# Allegro board test-um_01v1.brd
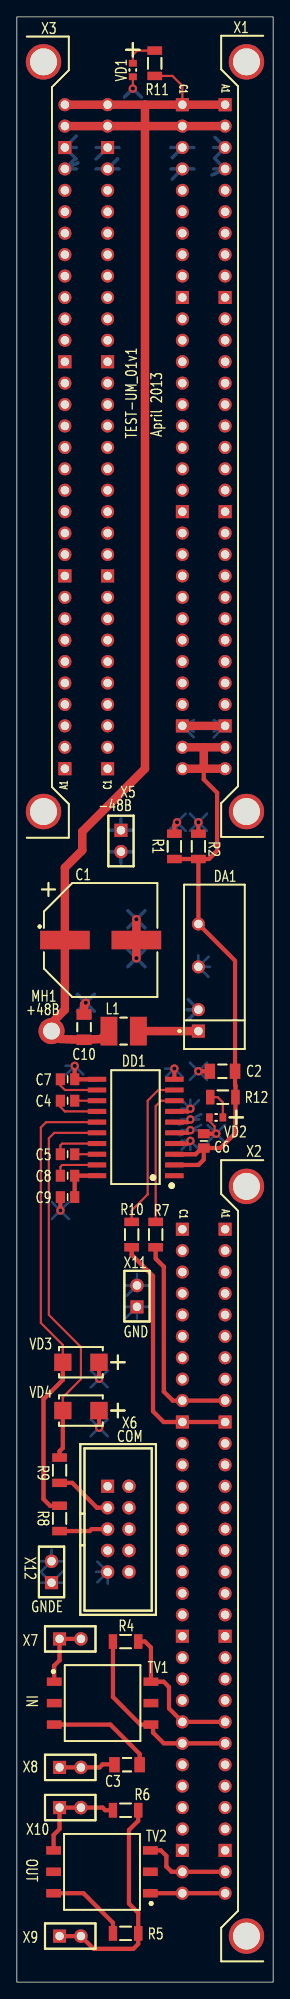
[diagram p0: board, top side]
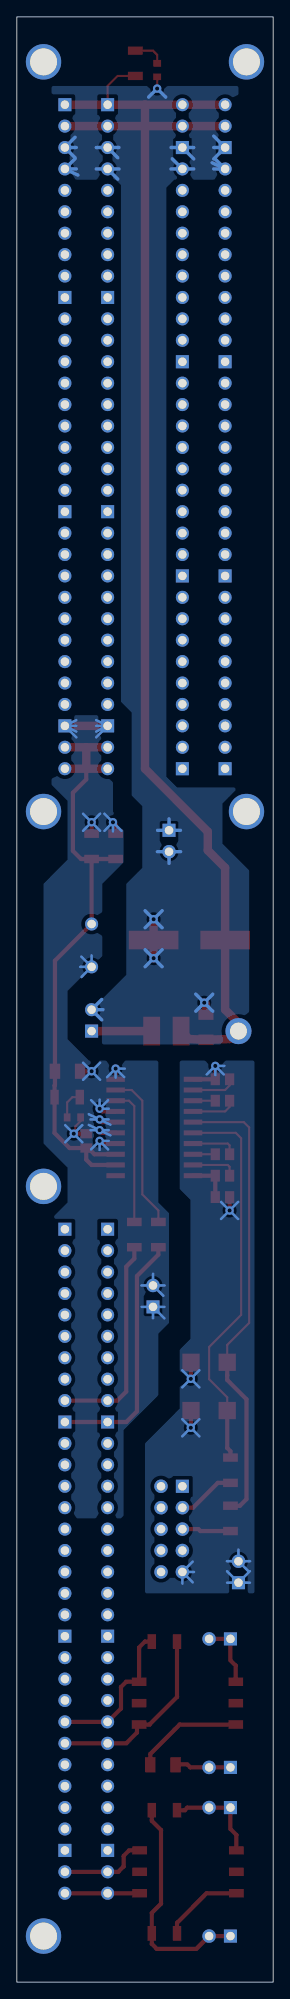
[diagram p1: board, bottom side, seen from below]

Outline 30.48 x 233.04 mm; copper layers: TOP, BOTTOM. Coordinates in mm from the lower left corner of the outline.
Outline path: rectangle 0,0 30.48,233.04

## Placement (name value [footprint] x y rotation side)
C1  47,0u  [CAPAE1350X1550N]  9.96 123.57 0 top
C2  10,0u  [CAPC3216X180N]  24.45 108.01 180 top
C3  1,0u  [CAPC3216X95N]  13.11 25.78 180 top
C4  0,1u  [CAPC2013X95N]  6.03 104.52 0 top
C5  0,1u  [CAPC2013X95N]  6.03 98.17 180 top
C6  0,1u  [CAPC2013X95N]  22.23 99.76 90 top
C7  0,1u  [CAPC2013X95N]  6.03 107.06 0 top
C8  0,1u  [CAPC2013X95N]  6.03 95.63 0 top
C9  0,1u  [CAPC2013X95N]  6.03 93.09 180 top
C10  0,1u  [CAPC3216X145N]  8 113.24 90 top
DA1  P6CU-4805ELF  [SIP720W50P254L1950H1050Q7P_S1KV]  23.49 120.4 180 top
DD1  ADM3251  [SOIC127P1032X265-20]  18.73 95.63 90 top
L1  10u  [INDC4532X280N]  12.7 112.78 0 top
MH1  +48B  [MTG_180_310]  4.13 112.78 0 top
R1  510  [RESC3116X65N]  18.73 134.68 270 top
R2  510  [RESC3116X65N]  21.59 134.68 270 top
R4  200  [RESC3116X65N]  12.93 40.39 0 top
R5  75  [RESC3116X65N]  12.93 5.78 0 top
R6  75  [RESC3116X65N]  12.93 20.38 0 top
R7  510  [RESC3116X65N]  16.51 88.65 270 top
R8  100  [RESC3116X65N]  5.08 54.99 90 top
R9  100  [RESC3116X65N]  5.08 60.71 90 top
R10  100  [RESC3116X65N]  13.65 88.65 270 top
R11  20k  [RESC3116X65N]  16.39 227.54 270 top
R12  2k  [RESC3116X65N]  24.49 104.94 180 top
TV1  78253  [XFMR_78253MVC]  10.2 33.08 0 top
TV2  78253  [XFMR_78253MVC]  10.12 13.08 180 top
VD1  green  [LEDC1608X110N]  13.79 226.74 90 top
VD2  green  [LEDC1608X110N]  23.7 102.54 0 top
VD3  18B  [DIOM5236X261N]  7.62 73.5 0 top
VD4  18B  [DIOM5236X261N]  7.62 67.78 0 top
X1  DIN-32x2FR  [DIN_41612_64_FR]  27.94 183.26 180 top
X2  DIN-32x2FR  [DIN_41612_64_FR]  27.94 49.91 180 top
X3  DIN-32x2  [DIN_41612_64_MR]  2.54 183.26 0 top
X5  -48B  [HDRV1X2P254]  12.38 135.32 270 top
X6  IDC-10M  [IDC_10M]  12.06 53.72 0 top
X7  UM_IN-  [HDRV1X2P254]  6.35 40.7 0 top
X8  UM_IN+  [HDRV1X2P254]  6.35 25.46 0 top
X9  UM_OUT+  [HDRV1X2P254]  6.35 5.46 0 top
X10  UM_OUT-  [HDRV1X2P254]  6.35 20.7 0 top
X11  PLS-2  [HDRV1X2P254]  14.29 81.34 90 top
X12  PLS-2  [HDRV1X2P254]  4.13 48.64 90 top

## Library data of the parts
C1 = CAP_P
C2-C10 = CAP_NP
DA1 = SIP7_SINGLE_4_6
DD1 = ADM3251_RW20
L1 = INDUCTOR
MH1 = MOUNTING_HOLE_PLATED
R1 R2 R4-R12 = RES_0.25W
TV1 TV2 = 78253
VD1 VD2 = DIODE_LED
VD3 VD4 = DIODE_TVS_BI
X1 X2 = CON_32X2
X3 = CON_32x2
X5 X7-X12 = CON_2
X6 = CON_10

## Footprints (pads in the part's own frame, mm; a bottom-side part is the same pattern mirrored in y, then rotated)
CAPAE1350X1550N
  rect 5.9x2.2 smd: 1(-4.25,0) 2(4.25,0)
CAPC2013X95N
  rect 1.1x1.4 smd: 1(-0.85,0) 2(0.85,0)
CAPC3216X95N
  rect 1.25x1.8 smd: 1(-1.5,0) 2(1.5,0)
CAPC3216X145N
  rect 1.25x1.8 smd: 1(-1.5,0) 2(1.5,0)
CAPC3216X180N
  rect 1.25x1.8 smd: 1(-1.5,0) 2(1.5,0)
DIN_41612_64_FR
  rect 1.55x1.55 hole 1: A1(3.175,-39.37) A10(3.175,-16.51) A20(3.175,8.89) A30(3.175,34.29) C1(8.255,-39.37) C10(8.255,-16.51) C20(8.255,8.89) C30(8.255,34.29)
  round 1.55 hole 1: A2(3.175,-36.83) A3(3.175,-34.29) A4(3.175,-31.75) A5(3.175,-29.21) A6(3.175,-26.67) A7(3.175,-24.13) A8(3.175,-21.59) A9(3.175,-19.05) A11(3.175,-13.97) A12(3.175,-11.43) A13(3.175,-8.89) A14(3.175,-6.35) A15(3.175,-3.81) A16(3.175,-1.27) A17(3.175,1.27) A18(3.175,3.81) A19(3.175,6.35) A21(3.175,11.43) A22(3.175,13.97) A23(3.175,16.51) A24(3.175,19.05) A25(3.175,21.59) A26(3.175,24.13) A27(3.175,26.67) A28(3.175,29.21) A29(3.175,31.75) A31(3.175,36.83) A32(3.175,39.37) C2(8.255,-36.83) C3(8.255,-34.29) C4(8.255,-31.75) C5(8.255,-29.21) C6(8.255,-26.67) C7(8.255,-24.13) C8(8.255,-21.59) C9(8.255,-19.05) C11(8.255,-13.97) C12(8.255,-11.43) C13(8.255,-8.89) C14(8.255,-6.35) C15(8.255,-3.81) C16(8.255,-1.27) C17(8.255,1.27) C18(8.255,3.81) C19(8.255,6.35) C21(8.255,11.43) C22(8.255,13.97) C23(8.255,16.51) C24(8.255,19.05) C25(8.255,21.59) C26(8.255,24.13) C27(8.255,26.67) C28(8.255,29.21) C29(8.255,31.75) C31(8.255,36.83) C32(8.255,39.37)
  round 4.2 hole 3.2: HOLE1(0.635,-44.45) HOLE2(0.635,44.45)
DIN_41612_64_MR
  rect 1.55x1.55 hole 1: A1(3.175,-39.37) A10(3.175,-16.51) A20(3.175,8.89) A30(3.175,34.29) C1(8.255,-39.37) C10(8.255,-16.51) C20(8.255,8.89) C30(8.255,34.29)
  round 1.55 hole 1: A2(3.175,-36.83) A3(3.175,-34.29) A4(3.175,-31.75) A5(3.175,-29.21) A6(3.175,-26.67) A7(3.175,-24.13) A8(3.175,-21.59) A9(3.175,-19.05) A11(3.175,-13.97) A12(3.175,-11.43) A13(3.175,-8.89) A14(3.175,-6.35) A15(3.175,-3.81) A16(3.175,-1.27) A17(3.175,1.27) A18(3.175,3.81) A19(3.175,6.35) A21(3.175,11.43) A22(3.175,13.97) A23(3.175,16.51) A24(3.175,19.05) A25(3.175,21.59) A26(3.175,24.13) A27(3.175,26.67) A28(3.175,29.21) A29(3.175,31.75) A31(3.175,36.83) A32(3.175,39.37) C2(8.255,-36.83) C3(8.255,-34.29) C4(8.255,-31.75) C5(8.255,-29.21) C6(8.255,-26.67) C7(8.255,-24.13) C8(8.255,-21.59) C9(8.255,-19.05) C11(8.255,-13.97) C12(8.255,-11.43) C13(8.255,-8.89) C14(8.255,-6.35) C15(8.255,-3.81) C16(8.255,-1.27) C17(8.255,1.27) C18(8.255,3.81) C19(8.255,6.35) C21(8.255,11.43) C22(8.255,13.97) C23(8.255,16.51) C24(8.255,19.05) C25(8.255,21.59) C26(8.255,24.13) C27(8.255,26.67) C28(8.255,29.21) C29(8.255,31.75) C31(8.255,36.83) C32(8.255,39.37)
  round 4.2 hole 3.2: HOLE1(0.635,-44.45) HOLE2(0.635,44.45)
DIOM5236X261N
  rect 2.05x2.05 smd: A(2.15,0) C(-2.15,0)
HDRV1X2P254
  rect 1.55x1.55 hole 1: 1(-1.27,0)
  round 1.6 hole 1: 2(1.27,0)
IDC_10M
  rect 1.55x1.55 hole 1: 1(-1.27,5.08)
  round 1.6 hole 1: 2(1.27,5.08) 3(-1.27,2.54) 4(1.27,2.54) 5(-1.27,0) 6(1.27,0) 7(-1.27,-2.54) 8(1.27,-2.54) 9(-1.27,-5.08) 10(1.27,-5.08)
INDC4532X280N
  rect 2x3.4 smd: 1(-1.75,0) 2(1.75,0)
LEDC1608X110N
  rect 0.8x0.95 smd: A(0.8,0) C(-0.8,0)
MTG_180_310
  round 3.1 hole 2: 1(0,0)
RESC3116X65N
  rect 1x1.75 smd: 1(-1.5,0) 2(1.5,0)
SIP720W50P254L1950H1050Q7P_S1KV
  rect 1.55x1.55 hole 1: 1(1.905,7.62)
  round 1.55 hole 1: 2(1.905,5.08) 4(1.905,0) 6(1.905,-5.08)
SOIC127P1032X265-20
  rect 0.6x2.2 smd: 1(0,0) 2(1.27,0) 3(2.54,0) 4(3.81,0) 5(5.08,0) 6(6.35,0) 7(7.62,0) 8(8.89,0) 9(10.16,0) 10(11.43,0) 11(11.43,9.2) 12(10.16,9.2) 13(8.89,9.2) 14(7.62,9.2) 15(6.35,9.2) 16(5.08,9.2) 17(3.81,9.2) 18(2.54,9.2) 19(1.27,9.2) 20(0,9.2)
XFMR_78253MVC
  rect 1.75x1 smd: 1(-5.75,2.54) 2(-5.75,0) 3(-5.75,-2.54) 4(5.75,-2.54) 5(5.75,0) 6(5.75,2.54)

## Nets
GND: C2.2 C6.2 DA1.4(-VOUT) DD1.4(GND#0) DD1.5(GND#1) DD1.6(GND#2) DD1.7(GND#3) DD1.10(GND#4) R1.1 R2.1 VD2.C X1.A30 X1.C30 X11.1 X11.2
GNDE: C7.2 C9.2 DD1.11(GNDISO) VD3.A VD4.A X6.9 X12.1 X12.2
+5B: C2.1 C6.1 DA1.6(+VOUT) DD1.2(VCC#0) DD1.3(VCC#1) R1.2 R2.2 R12.1 X1.A31 X1.A32 X1.C31 X1.C32
+48B: C1.1 C10.1 L1.1 MH1.1 R11.2 X1.A1 X1.A2 X1.C1 X1.C2 X3.A31 X3.A32 X3.C31 X3.C32
+BSP_IN_HF: R5.2 R6.2 X9.1 X9.2
+BSP_OUT_HF: C3.2 X8.1 X8.2
-48B: C1.2 C10.2 DA1.2(-VIN) VD1.C X1.A3 X1.A4 X1.C3 X1.C4 X3.A29 X3.A30 X3.C29 X3.C30 X5.1 X5.2
-BSP_IN_HF: R6.1 TV2.4 X10.1 X10.2
-BSP_OUT_HF: TV1.1 X7.1 X7.2
IO1: R4.2 TV1.6 X2.A24 X2.C24
IO2: R4.1 TV1.4 X2.A25 X2.C25
IO3: TV2.3 X2.A31 X2.C31
IO4: TV2.1 X2.A32 X2.C32
RXD: R9.1 X6.3
RXUM: R10.2 X2.A10 X2.C10
TXD: R8.1 X6.5
TXUM: R7.2 X2.A9 X2.C9
N01903: R5.1 TV2.6
N03987: C3.1 TV1.3
N70867: DD1.15(RIN) R8.2 VD3.C
N70871: DD1.16(TOUT) R9.2 VD4.C
N70875: C4.1 DD1.14(C2+)
N70879: C4.2 DD1.13(C2-)
N70891: C5.1 DD1.18(C1+)
N70911: C5.2 DD1.17(C1-)
N70923: C7.1 DD1.12(V-)
N70931: C8.1 DD1.19(V+)
N70935: C8.2 C9.1 DD1.20(VISO)
N128847: DA1.1(+VIN) L1.2
N138210: DD1.8(ROUT) R7.1
N138266: DD1.9(TIN) R10.1
N141744: R11.1 VD1.A
N141896: R12.2 VD2.A

Pads without a net: DD1 1; TV1 2 5; TV2 2 5; X1 A5 A6 A7 A8 A9 A10 A11 A12 A13 A14 A15 A16 A17 A18 A19 A20 A21 A22 A23 A24 A25 A26 A27 A28 A29 C5 C6 C7 C8 C9 C10 C11 C12 C13 C14 C15 C16 C17 C18 C19 C20 C21 C22 C23 C24 C25 C26 C27 C28 C29 HOLE1 HOLE2; X2 A1 A2 A3 A4 A5 A6 A7 A8 A11 A12 A13 A14 A15 A16 A17 A18 A19 A20 A21 A22 A23 A26 A27 A28 A29 A30 C1 C2 C3 C4 C5 C6 C7 C8 C11 C12 C13 C14 C15 C16 C17 C18 C19 C20 C21 C22 C23 C26 C27 C28 C29 C30 HOLE1 HOLE2; X3 A1 A2 A3 A4 A5 A6 A7 A8 A9 A10 A11 A12 A13 A14 A15 A16 A17 A18 A19 A20 A21 A22 A23 A24 A25 A26 A27 A28 C1 C2 C3 C4 C5 C6 C7 C8 C9 C10 C11 C12 C13 C14 C15 C16 C17 C18 C19 C20 C21 C22 C23 C24 C25 C26 C27 C28 HOLE1 HOLE2; X6 1 2 4 6 7 8 10

## Via types
v1: diameter 1, hole 0.5, TOP to BOTTOM, 17 vias

## Routing (per net, layer and track width the routed paths; a pad name or vN(x,y) marks a point on that pad's centre or on a via; arc(x,y) is an arc through that point)
GND: length 100.7
  TOP w0.25: v1(23.71,100.61) 23.52,100.8 23.52,101.49 22.89,102.11 VD2.C
  TOP w0.5: v1(19.05,137.54) 18.73,137.22 R1.1 ; DD1.6 20.32,101.98 v1(20.64,102.3) ; DD1.5 20.32,100.71 v1(20.64,101.03) ; C6.2 v1(23.71,100.61) ; DD1.7 20.32,103.25 v1(20.64,103.57) ; DD1.10 v1(18.73,108.33) ; v1(20.64,99.76) 20.32,99.44 DD1.4 ; C2.2 v1(21.59,108.01) ; R2.1 v1(21.59,137.54)
  TOP w1: X1.A30 X1.C30
  BOTTOM w0.303: 23.41,148.97 X1.A30 ; X1.A30 23.41,148.29 ; X1.A30 23.41,147.62 ; X1.A30 23.41,149.65 ; 19.05,136.46 v1(19.05,137.54) ; v1(19.05,137.54) 20.06,138.55 ; v1(19.05,137.54) 18.04,136.53 ; v1(19.05,137.54) 20.06,136.53 ; v1(20.64,103.57) 21.65,104.58 ; v1(20.64,103.57) 20.64,104.65 ; v1(20.64,103.57) 19.62,104.58 ; v1(20.64,103.57) 19.56,103.57 ; 20.64,98.68 v1(20.64,99.76) ; v1(20.64,99.76) 21.65,98.75 ; v1(20.64,99.76) 19.62,98.75 ; v1(20.64,99.76) 19.56,99.76 ; v1(20.64,101.03) 21.93,101.65 ; v1(20.64,101.03) 19.56,101.03 ; v1(20.64,101.03) 21.72,101.03 ; v1(20.64,101.03) 19.35,100.41 ; 17.65,108.33 v1(18.73,108.33) ; v1(18.73,108.33) 19.75,107.32 ; v1(18.73,108.33) 17.72,107.32 ; v1(18.73,108.33) 18.73,107.25 ; 22.7,99.6 v1(23.71,100.61) ; v1(23.71,100.61) 22.7,101.62 ; v1(23.71,100.61) 24.72,101.62 ; v1(23.71,100.61) 24.72,99.6 ; 13.06,81.39 X11.2 ; X11.2 15.67,82.61 ; X11.2 12.91,82.61 ; X11.2 14.29,83.99 ; v1(21.59,108.01) 22.6,109.03 ; v1(21.59,108.01) 22.6,107 ; v1(21.59,108.01) 20.58,109.03 ; v1(21.59,108.01) 20.58,107 ; 19.35,101.67 v1(20.64,102.3) ; v1(20.64,102.3) 21.72,102.3 ; v1(20.64,102.3) 21.93,102.92 ; v1(20.64,102.3) 19.56,102.3 ; DA1.4 22.8,119.19 ; DA1.4 22.94,120.4 ; DA1.4 21.59,121.75 ; DA1.4 22.8,121.6 ; 20.58,138.55 v1(21.59,137.54) ; v1(21.59,137.54) 22.6,136.53 ; v1(21.59,137.54) 22.6,138.55 ; v1(21.59,137.54) 20.58,136.53 ; 14.29,78.72 X11.1 ; X11.1 12.93,80.07 ; X11.1 12.93,78.72 ; X11.1 15.64,80.07 ; X1.C30 21.04,148.29 ; X1.C30 21.04,147.62 ; X1.C30 21.04,149.65 ; X1.C30 21.04,148.97
GNDE: length 50.7
  TOP w0.5: v1(9.79,71.54) 9.77,73.5 VD3.A ; C9.2 v1(5.18,91.5) ; DD1.11 C7.2 v1(6.88,108.65) ; v1(9.79,65.74) 9.77,67.78 VD4.A
  BOTTOM w0.303: 8.78,66.75 v1(9.79,65.74) ; v1(9.79,65.74) 8.78,64.73 ; v1(9.79,65.74) 10.81,64.73 ; v1(9.79,65.74) 10.81,66.75 ; v1(5.18,91.5) 6.2,92.52 ; v1(5.18,91.5) 4.17,92.52 ; v1(5.18,91.5) 4.17,90.49 ; v1(5.18,91.5) 6.2,90.49 ; X12.2 4.13,51.29 ; X12.2 2.75,49.91 ; X12.2 5.51,49.91 ; X12.2 2.9,48.69 ; 8.78,72.55 v1(9.79,71.54) ; v1(9.79,71.54) 10.81,70.53 ; v1(9.79,71.54) 10.81,72.55 ; v1(9.79,71.54) 8.78,70.53 ; v1(6.88,108.65) 7.9,107.64 ; v1(6.88,108.65) 5.87,107.64 ; v1(6.88,108.65) 6.88,107.57 ; v1(6.88,108.65) 5.8,108.65 ; X12.1 5.48,48.72 ; X12.1 2.77,47.37 ; X12.1 2.77,48.72 ; X12.1 5.48,47.37 ; 9.57,49.87 X6.9 ; X6.9 9.42,48.64 ; X6.9 10.79,47.26 ; X6.9 9.57,47.42
+5B: length 76.3
  TOP w0.5: DD1.2 21.59,96.9 22.23,97.54 C6.1 ; DD1.3 21.26,98.17 22,98.91 C6.1 ; R2.2 22.84,133.18 23.81,134.15 23.81,141.03 22.23,142.62 22.23,143.89 ; R2.2 DA1.6 25.95,121.12 C2.1 25.95,106.36 25.99,106.32 R12.1 25.99,100.69 24.21,98.91 C6.1 ; R2.2 R1.2
  TOP w1: X1.C31 22.23,146.43 ; 22.23,146.43 X1.A31 ; 22.23,146.43 22.23,143.89 ; X1.A32 22.23,143.89 ; 22.23,143.89 X1.C32
+48B: length 166.2
  TOP w0.25: R11.2 18.5,226.04 19.69,224.85 X1.C1
  TOP w1: 15.24,220.09 15.24,222.63 ; 15.24,220.09 15.24,143.89 7.78,136.43 7.78,134.21 5.71,132.15 C1.1 5.71,115.32 4.13,113.73 MH1.1 4.26,112.78 5.2,111.84 C10.1 10.02,111.84 L1.1 ; 15.24,220.09 X1.C2 X1.A2 ; 15.24,220.09 X3.C31 X3.A31 ; 15.24,222.63 X1.C1 X1.A1 ; 15.24,222.63 X3.C32 X3.A32
+BSP_IN_HF: length 27
  TOP w0.5: R6.2 14.43,19.13 13.34,18.04 13.34,9.3 14.43,8.21 R5.2 14.43,4.53 13.85,3.95 9.14,3.95 X9.2 X9.1
+BSP_OUT_HF: length 6.7
  TOP w0.5: X8.1 X8.2 9.84,25.46 10.2,25.82 11.57,25.82 C3.2
-48B: length 77.9
  TOP w0.25: VD1.C v1(13.79,224.54)
  TOP w1: v1(14.21,121.42) C1.2 v1(14.21,126.04) ; v1(8.2,116.14) 8,115.94 C10.2
  BOTTOM w0.403: 7.18,117.15 v1(8.2,116.14) ; v1(8.2,116.14) 7.18,115.13 ; v1(8.2,116.14) 9.21,117.15 ; v1(8.2,116.14) 9.21,115.13 ; 11,134.05 X5.2 ; X5.2 13.76,134.05 ; X5.2 12.38,132.67 ; 23.56,216.34 X1.A3 ; X1.A3 23.41,217.55 ; X1.A3 23.56,218.76 ; 11.03,136.59 X5.1 ; X5.1 12.38,137.94 ; X5.1 13.74,136.59 ; 9.44,215.01 X3.C29 ; X3.C29 12.15,215.01 ; X3.C29 12,216.22 ; 13.2,122.43 v1(14.21,121.42) ; v1(14.21,121.42) 15.23,120.41 ; v1(14.21,121.42) 15.23,122.43 ; v1(14.21,121.42) 13.2,120.41 ; X1.C4 21.04,215.01 ; X1.C4 18.48,213.8 ; X1.C4 18.33,215.01 ; X3.A30 7.07,218.91 ; X3.A30 7.07,217.55 ; X3.A30 7.07,216.2 ; 20.24,115.32 DA1.2 ; DA1.2 20.38,114.11 ; DA1.2 20.38,116.52 ; X1.C3 21.04,217.55 ; X1.C3 18.33,217.55 ; X1.C3 18.48,216.34 ; X3.A29 7.07,215.01 ; X3.A29 7.26,215.74 ; X3.A29 6.92,216.22 ; 23.22,214.28 X1.A4 ; X1.A4 23.41,215.01 ; X1.A4 23.56,216.22 ; 13.2,125.03 v1(14.21,126.04) ; v1(14.21,126.04) 15.23,125.03 ; v1(14.21,126.04) 13.2,127.05 ; v1(14.21,126.04) 15.23,127.05 ; 9.44,217.55 X3.C30 ; X3.C30 9.44,216.2 ; X3.C30 12.15,217.55 ; 14.81,223.53 v1(13.79,224.54) 12.78,223.53
-BSP_IN_HF: length 11.9
  TOP w0.5: TV2.4 4.38,17.46 5.08,18.16 X10.1 X10.2 10.2,20.7 10.52,20.38 11.43,20.38
-BSP_OUT_HF: length 7.9
  TOP w0.5: TV1.1 4.45,37.53 5.08,38.16 X7.1 X7.2
IO1: length 18.1
  TOP w0.5: X2.A24 X2.C24 18.1,32.45 18.1,34.99 17.46,35.62 TV1.6 15.95,39.68 15.24,40.39 R4.2
IO2: length 22.6
  TOP w0.5: 11.43,40.39 11.43,33.81 14.69,30.54 TV1.4 16.19,30.3 16.19,29.59 17.46,28.32 X2.C25 X2.A25
IO3: length 10.7
  TOP w0.5: TV2.3 17.13,15.62 17.78,14.97 17.78,13.72 18.41,13.08 X2.C31 X2.A31
IO4: length 8.9
  TOP w0.5: TV2.1 X2.C32 X2.A32
RXD: length 6.9
  TOP w0.5: R9.1 6.58,59.21 9.53,56.26 X6.3
RXUM: length 29.6
  TOP w0.5: R10.2 13.65,86.27 16.2,83.73 16.2,67.69 17.46,66.42 X2.C10 X2.A10
TXD: length 5.8
  TOP w0.5: X6.5 8.89,53.72 8.66,53.49 R8.1
TXUM: length 25.3
  TOP w0.5: X2.A9 X2.C9 18.54,68.96 17.47,70.02 17.47,84.84 16.51,85.8 R7.2
N01903: length 9.8
  TOP w0.5: 11.43,5.78 11.43,7.03 7.92,10.54 TV2.6
N03987: length 12.9
  TOP w0.5: TV1.3 11.12,30.54 14.61,27.06 C3.1
N70867: length 55.3
  TOP w0.25: VD3.C 5.46,75.55 5.47,75.56 2.86,78.17 2.86,101.35 3.49,101.98 DD1.15
  TOP w0.5: R8.2 3.95,56.49 3.17,57.27 3.17,69.12 5.47,71.42 5.47,71.97 5.46,71.98 VD3.C
N70871: length 46.5
  TOP w0.25: VD4.C 5.46,69.35 7.62,71.5 7.62,75.31 3.81,79.12 3.81,100.08 4.45,100.71 DD1.16
  TOP w0.5: R9.2 5.08,62.96 5.47,63.35 5.46,63.35 VD4.C
N70875: length 5.3
  TOP w0.25: DD1.14 5.71,103.25 5.18,103.78 C4.1
N70879: length 2.6
  TOP w0.25: DD1.13 C4.2
N70891: length 2.6
  TOP w0.25: DD1.18 C5.1
N70911: length 5.5
  TOP w0.25: DD1.17 5.4,99.44 5.18,99.23 C5.2
N70923: length 5.3
  TOP w0.25: DD1.12 5.71,105.79 5.18,106.32 C7.1
N70931: length 5.5
  TOP w0.25: C8.1 5.18,96.69 5.4,96.9 DD1.19
N70935: length 5.2
  TOP w0.5: DD1.20 C8.2 C9.1
N128847: length 7.1
  TOP w1: L1.2 21.59,112.78
N138210: length 16.2
  TOP w0.25: R7.1 16.51,103.89 17.14,104.52 DD1.8
N138266: length 18.9
  TOP w0.25: DD1.9 16.83,105.79 15.56,104.52 15.56,93.41 13.65,91.5 R10.1
N141744: length 3.8
  TOP w0.25: VD1.A 13.79,228.54 14.29,229.04 R11.1
N141896: length 3.5
  TOP w0.25: VD2.A 24.49,104.32 23.87,104.94 R12.2

## Copper pours and planes (outline as drawn; the poured copper is in the pictures)
GND on BOTTOM: 26.35,54.99 18.1,54.99 17.78,55.31 17.78,65.47 13.65,69.6 13.65,76.9 12.38,78.17 12.38,91.19 13.65,92.46 13.65,109.28 21.91,109.28 24.45,111.82 24.45,117.54 20.32,121.67 20.32,130.24 17.78,132.78 17.78,137.54 19.05,138.81 19.05,150.24 26.35,150.24 26.35,141.99 24.45,140.08 24.45,133.1 27.3,130.24 27.3,99.44 24.45,96.58 24.45,92.46 26.35,90.55
GNDE on BOTTOM: 11.11,109.28 2.22,109.28 2.22,46.1 15.24,46.1 15.24,63.88 11.11,68.01 11.11,74.99 9.84,76.26 9.84,92.77 11.11,94.04
-48B on BOTTOM: 26.35,224.85 4.13,224.85 4.13,213.74 11.75,213.74 12.7,212.79 12.7,142.94 11.43,141.67 4.13,141.67 6.03,139.76 6.03,135 2.86,131.83 2.86,113.73 5.4,111.19 21.91,111.19 22.54,111.82 22.54,115.95 22.23,116.27 20.64,116.27 17.46,119.44 17.46,130.24 15.56,132.14 15.56,139.45 16.83,140.72 16.83,150.56 18.1,151.83 18.1,213.11 18.73,213.74 26.35,213.74

## Text on the board
Ref Des/Silkscreen Top: TEST-UM_01v1 | April 2013
PLACE_BOUND_TOP: January 2013 | KPRM_02v1
User.6: FIGURE | SIZE | 0.5 | 1.0 | 2.0 | 3.2 | DRILL CHART: TOP to BOTTOM | ALL UNITS ARE IN MILLIMETERS | PLATED | QTY | 17 | 220 | 1 | 6
